# EAGLE board nrings (EAGLE 7.5.0)
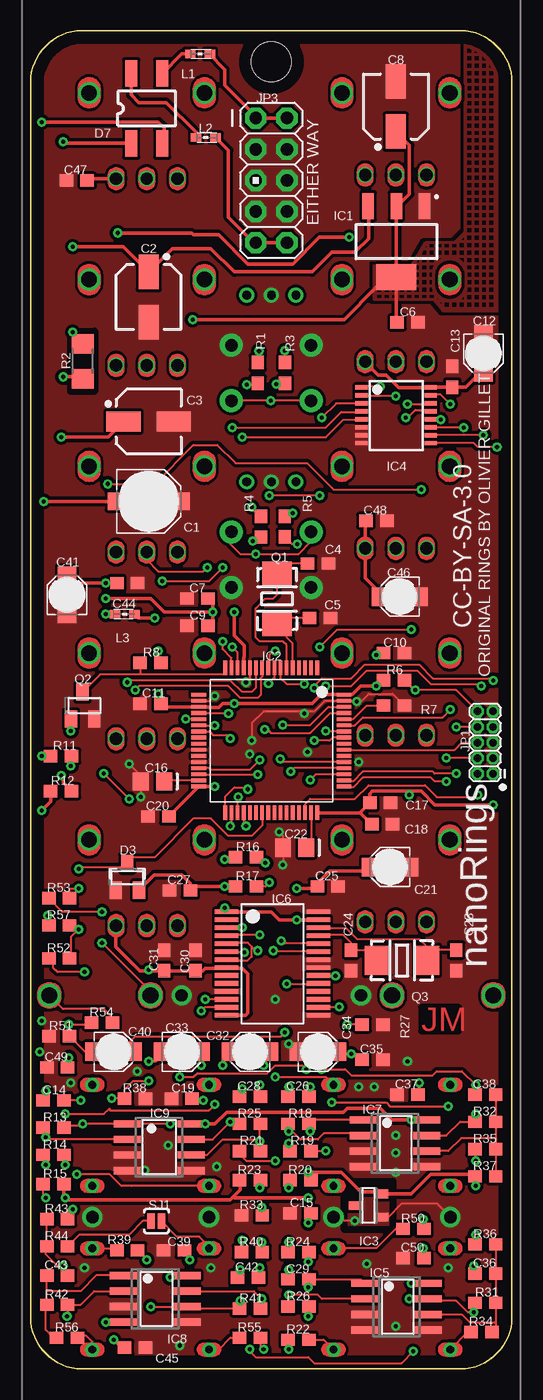
[diagram p0: board, top side]
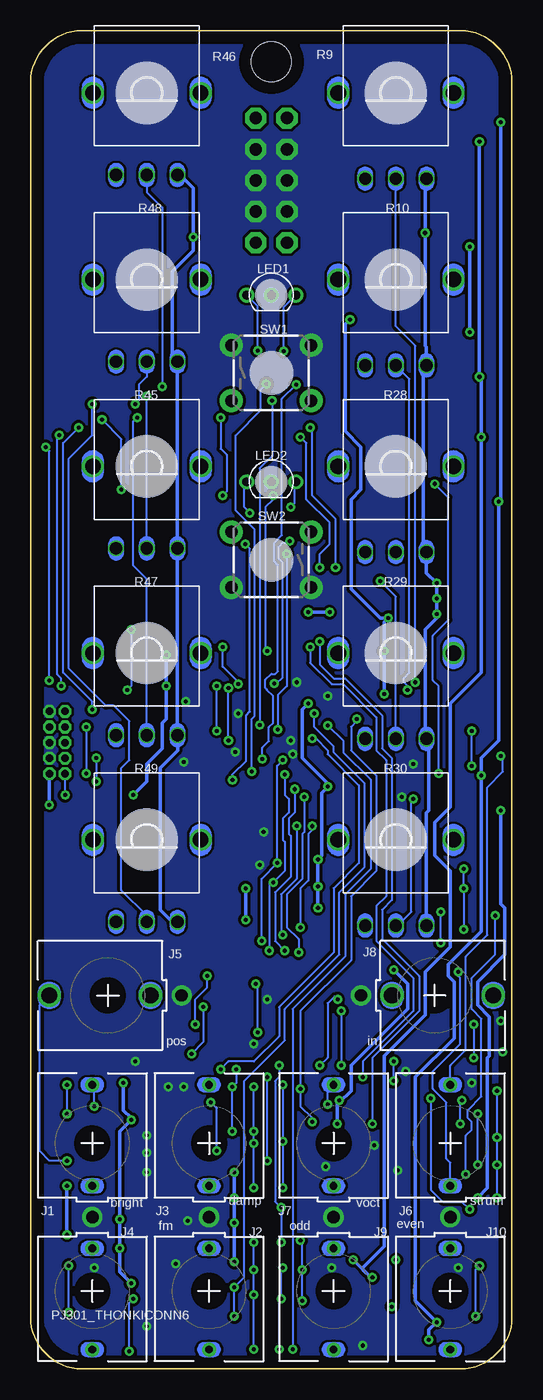
[diagram p1: board, bottom side, seen from below]

Size 39.27 x 109.22 mm. Coordinates in mm from the lower left corner, seen from the top.
Outline: 0,3.81 arc76 3.76,0 35.51,0 arc76 39.27,3.81 39.27,105.41 arc76 35.51,109.22 3.76,109.22 arc76 0,105.41 0,3.81
Copper layers (1*16): Top 0.035mm / dielectric 1.5mm / Bottom 0.035mm
Design rules "default *": minimum track width 10mil, minimum drill 0.61mm, track to track 8mil, track to pad 8mil, pad to pad 8mil, via to via 8mil, smd to smd 8mil, copper to edge 40mil, drill to drill 8mil, minimum pad ring 0mil, minimum via ring 8mil, stop-mask expansion 4mil, vias tented up to drill 13mil, thermal gap 10mil
Net classes: 0 default: width 0.178 mm, clearance 0.152 mm, clearance 0.152 mm to class 1, clearance 0.152 mm to class 2; 1 hipriority: width 0.178 mm, clearance 0.152 mm, clearance 0.152 mm to class 0, clearance 0.152 mm to class 2; 2 powa: width 0.305 mm, clearance 0.152 mm, clearance 0.152 mm to class 0, clearance 0.152 mm to class 1
Holes 3.23 mm at 19.63,106.68

## Footprints (pad centres in the part's own frame; a part is rotated, then mirrored left to right if it is on the bottom)
PANASONIC_C = smd 2.6 x 1.4: + 2.05,0; - -2.05,0
CAPAE-5.3x5.3h7 = smd 2.8 x 1.65: 1 -2.05,0; 2 2.05,0
CAPAE-5.3x5.3h7_C3 = smd 2.8 x 1.65: 1 -2.05,0; 2 2.05,0
CAP_0603 = smd 1.1 x 1: 1 -0.85,0; 2 0.85,0
CAP_0603_C6 = smd 1.1 x 1: 1 -0.85,0; 2 0.85,0
CAP_0603_C7 = smd 1.1 x 1: 1 -0.85,0; 2 0.85,0
CAPAE-5.3x5.3h7_C8 = smd 2.8 x 1.65: 1 -2.05,0; 2 2.05,0
PANASONIC_A = smd 2 x 1.5: + 1.3,0; - -1.3,0
CAP_0603_C13 = smd 1.1 x 1: 1 -0.85,0; 2 0.85,0
CAP_0805 = smd 1.3 x 1.5: 1 -0.95,0; 2 0.95,0
PANASONIC_A_C21 = smd 2 x 1.5: + 1.3,0; - -1.3,0
CAP_0603_C23 = smd 1.1 x 1: 1 -0.85,0; 2 0.85,0
CAP_0603_C24 = smd 1.1 x 1: 1 -0.85,0; 2 0.85,0
PANASONIC_A_C32 = smd 2 x 1.5: + 1.3,0; - -1.3,0
PANASONIC_A_C33 = smd 2 x 1.5: + 1.3,0; - -1.3,0
PANASONIC_A_C34 = smd 2 x 1.5: + 1.3,0; - -1.3,0
CAP_0603_C39 = smd 1.1 x 1: 1 -0.85,0; 2 0.85,0
PANASONIC_A_C40 = smd 2 x 1.5: + 1.3,0; - -1.3,0
PANASONIC_A_C41 = smd 2 x 1.5: + 1.3,0; - -1.3,0
CAP_0603_C44 = smd 1.1 x 1: 1 -0.85,0; 2 0.85,0
CAP_0603_C45 = smd 1.1 x 1: 1 -0.85,0; 2 0.85,0
PANASONIC_A_C46 = smd 2 x 1.5: + 1.3,0; - -1.3,0
SOT23 = smd 1 x 1.4: 1 -0.95,-1.1; 2 0.95,-1.1; 3 0,1.1
SOP-4/6.5x2.54 = smd 2.2 x 1: 1 -2.855,1.27; 2 -2.855,-1.27; 3 2.855,-1.27; 4 2.855,1.27
SOT223-4 = smd 2.15 x 0.95: 1 -2.9,2.3; 2 -2.9,0; 3 -2.9,-2.3 | smd 2.15 x 3.25: 4 2.9,0
TQFP-10X10-64 = smd 1.2 x 0.3: 1 -5.936,3.75; 2 -5.936,3.25; 3 -5.936,2.75; 4 -5.936,2.25; 5 -5.936,1.75; 6 -5.936,1.25; 7 -5.936,0.75; 8 -5.936,0.25; 9 -5.936,-0.25; 10 -5.936,-0.75; 11 -5.936,-1.25; 12 -5.936,-1.75; 13 -5.936,-2.25; 14 -5.936,-2.75; 15 -5.936,-3.25; 16 -5.936,-3.75; 33 5.886,-3.75; 34 5.886,-3.25; 35 5.886,-2.75; 36 5.886,-2.25; 37 5.886,-1.75; 38 5.886,-1.25; 39 5.886,-0.75; 40 5.886,-0.25; 41 5.886,0.25; 42 5.886,0.75; 43 5.886,1.25; 44 5.886,1.75; 45 5.886,2.25; 46 5.886,2.75; 47 5.886,3.25; 48 5.886,3.75 | smd 0.3 x 1.2: 17 -3.75,-5.911; 18 -3.25,-5.911; 19 -2.75,-5.911; 20 -2.25,-5.911; 21 -1.75,-5.911; 22 -1.25,-5.911; 23 -0.75,-5.911; 24 -0.25,-5.911; 25 0.25,-5.911; 26 0.75,-5.911; 27 1.25,-5.911; 28 1.75,-5.911; 29 2.25,-5.911; 30 2.75,-5.911; 31 3.25,-5.911; 32 3.75,-5.911; 49 3.75,5.936; 50 3.25,5.936; 51 2.75,5.936; 52 2.25,5.936; 53 1.75,5.936; 54 1.25,5.936; 55 0.75,5.936; 56 0.25,5.936; 57 -0.25,5.936; 58 -0.75,5.936; 59 -1.25,5.936; 60 -1.75,5.936; 61 -2.25,5.936; 62 -2.75,5.936; 63 -3.25,5.936; 64 -3.75,5.936
DBZ_R-PDSO-G3 = smd 0.7 x 1: 1 -0.95,-1.1; 2 0.95,-1.1; 3 0,1.1
TSSOP16 = smd 0.35 x 1: 1 -1.95,-2.825; 2 -1.3,-2.825; 3 -0.65,-2.825; 4 0,-2.825; 5 0.65,-2.825; 6 1.3,-2.825; 7 1.95,-2.825; 8 2.6,-2.825; 9 2.6,2.825; 10 1.95,2.825; 11 1.3,2.825; 12 0.65,2.825; 13 0,2.825; 14 -0.65,2.825; 15 -1.3,2.825; 16 -1.95,2.825
SO08 = smd 0.6 x 2.2: 1 -1.905,-2.6; 2 -0.635,-2.6; 3 0.635,-2.6; 4 1.905,-2.6; 5 1.905,2.6; 6 0.635,2.6; 7 -0.635,2.6; 8 -1.905,2.6
SSOP28 = smd 0.381 x 1.905: 1 -4.55,-3.752; 2 -3.9,-3.752; 3 -3.25,-3.752; 4 -2.6,-3.752; 5 -1.95,-3.752; 6 -1.3,-3.752; 7 -0.65,-3.752; 8 0,-3.752; 9 0.65,-3.752; 10 1.3,-3.752; 11 1.95,-3.752; 12 2.6,-3.752; 13 3.25,-3.752; 14 3.9,-3.752; 15 3.9,3.752; 16 3.25,3.752; 17 2.6,3.752; 18 1.95,3.752; 19 1.3,3.752; 20 0.65,3.752; 21 0,3.752; 22 -0.65,3.752; 23 -1.3,3.752; 24 -1.95,3.752; 25 -2.6,3.752; 26 -3.25,3.752; 27 -3.9,3.752; 28 -4.55,3.752
SO08_IC7 = smd 0.6 x 2.2: 1 -1.905,-2.6; 2 -0.635,-2.6; 3 0.635,-2.6; 4 1.905,-2.6; 5 1.905,2.6; 6 0.635,2.6; 7 -0.635,2.6; 8 -1.905,2.6
SO08_IC8 = smd 0.6 x 2.2: 1 -1.905,-2.6; 2 -0.635,-2.6; 3 0.635,-2.6; 4 1.905,-2.6; 5 1.905,2.6; 6 0.635,2.6; 7 -0.635,2.6; 8 -1.905,2.6
SO08_IC9 = smd 0.6 x 2.2: 1 -1.905,-2.6; 2 -0.635,-2.6; 3 0.635,-2.6; 4 1.905,-2.6; 5 1.905,2.6; 6 0.635,2.6; 7 -0.635,2.6; 8 -1.905,2.6
Thonkiconn = drill 0.635 pad 1.143: 1 0,3.48; 2 0,-4.775 | drill 1.016 pad 1.651: 3 0,6.02
Thonkiconn_J2 = drill 0.635 pad 1.143: 1 0,3.48; 2 0,-4.775 | drill 1.016 pad 1.651: 3 0,6.02
Thonkiconn_J4 = drill 0.635 pad 1.143: 1 0,3.48; 2 0,-4.775 | drill 1.016 pad 1.651: 3 0,6.02
Thonkiconn_J5 = drill 1.321 pad 1.905: 1 0,3.48; 2 0,-4.775 | drill 1.016 pad 1.651: 3 0,6.02
Thonkiconn_J9 = drill 0.635 pad 1.143: 1 0,3.48; 2 0,-4.775 | drill 1.016 pad 1.651: 3 0,6.02
2X5-1.27 = drill 0.61 pad 1.033 octagon: 1 -1.27,3.81; 2 0,3.81; 3 -1.27,2.54; 4 0,2.54; 5 -1.27,1.27; 6 0,1.27; 7 -1.27,0; 8 0,0; 9 -1.27,-1.27; 10 0,-1.27
AVR_ICSP = drill 1.016 pad 1.737 octagon: 1 -1.27,5.08; 2 1.27,5.08; 3 -1.27,2.54; 4 1.27,2.54; 5 -1.27,0; 6 1.27,0; 7 -1.27,-2.54; 8 1.27,-2.54; 9 -1.27,-5.08; 10 1.27,-5.08
0603 = smd 0.85 x 0.7: 1 -0.9,0; 2 0.7,0
0603_L2 = smd 0.85 x 0.7: 1 -0.9,0; 2 0.7,0
0603_L3 = smd 0.85 x 0.7: 1 -0.9,0; 2 0.7,0
LED-BICOLOR-THROUGHHOLE = drill 0.7 pad 1.208: 1 -2,0; 2 0,0; 3 2,0
TSC_7A_crystal = smd 2 x 2.4: 1 2.036,0; 2 -2.035,0
SOT23-BEC = smd 1 x 1.4: B -0.95,-1.1; C 0,1.1; E 0.95,-1.1
TSC_7A_crystal_Q3 = smd 2 x 2.4: 1 2.036,0; 2 -2.035,0
RES_0603 = smd 1.1 x 1: 1 -0.85,0; 2 0.85,0
R1206 = smd 1.6 x 1.803: 1 -1.422,0; 2 1.422,0
RES_0603_R4 = smd 1.1 x 1: 1 -0.85,0; 2 0.85,0
RES_0603_R5 = smd 1.1 x 1: 1 -0.85,0; 2 0.85,0
RES_0603_R6 = smd 1.1 x 1: 1 -0.85,0; 2 0.85,0
RES_0603_R7 = smd 1.1 x 1: 1 -0.85,0; 2 0.85,0
RES_0603_R8 = smd 1.1 x 1: 1 -0.85,0; 2 0.85,0
ALPS_POT_VERTICAL_PS = drill 1 pad 1.27: P$1 -2.5,7; P$2 0,7; P$3 2.5,7 | drill 1.27 pad 1.778: P$4 -4.7,0; P$5 4.7,0
ALPS_POT_VERTICAL_PS_R10 = drill 1 pad 1.27: P$1 -2.5,7; P$2 0,7; P$3 2.5,7 | drill 1.27 pad 1.778: P$4 -4.7,0; P$5 4.7,0
RES_0603_R27 = smd 1.1 x 1: 1 -0.85,0; 2 0.85,0
RES_0603_R39 = smd 1.1 x 1: 1 -0.85,0; 2 0.85,0
ALPS_POT_VERTICAL = drill 1 pad 1.27: P$1 -2.5,6.7; P$2 0,6.7; P$3 2.5,6.7 | drill 1.27 pad 1.778: P$4 -4.4,0; P$5 4.4,0
ALPS_POT_VERTICAL_R46 = drill 1 pad 1.27: P$1 -2.5,6.7; P$2 0,6.7; P$3 2.5,6.7 | drill 1.27 pad 1.778: P$4 -4.4,0; P$5 4.4,0
SJ_2S-NOTRACE = smd 0.635 x 1.27: 1 -0.45,0; 2 0.4,0
TACTILE-PTH = drill 1.016 pad 1.88: 1 -3.251,2.261; 2 3.251,2.261; 3 -3.251,-2.261; 4 3.251,-2.261
TACTILE-PTH_SW2 = drill 1.016 pad 1.88: 1 -3.251,2.261; 2 3.251,2.261; 3 -3.251,-2.261; 4 3.251,-2.261

## Placement (x,y rotation side)
C1  22u  [PANASONIC_C]  9.63,70.8 0 top
C2  47u  [CAPAE-5.3x5.3h7]  9.63,87.47 270 top
C3  47u  [CAPAE-5.3x5.3h7_C3]  9.63,77.31 0 top
C4  18p  [CAP_0603]  23.44,65.72 180 top
C5  18p  [CAP_0603]  23.6,61.28 180 top
C6  100n  [CAP_0603_C6]  30.75,85.41 0 top
C7  1u  [CAP_0603_C7]  13.6,62.87 180 top
C8  47u  [CAPAE-5.3x5.3h7_C8]  29.79,103.03 90 top
C9  100n  [CAP_0603_C7]  13.6,60.64 180 top
C10  100n  [CAP_0603_C6]  29.64,58.42 0 top
C11  100n  [CAP_0603_C7]  9.79,54.29 180 top
C12  10u  [PANASONIC_A]  36.94,82.87 270 top
C13  100n  [CAP_0603_C13]  34.4,80.96 90 top
C14  2.2n  [CAP_0603_C6]  1.85,21.91 0 top
C15  100n  [CAP_0603_C7]  22.02,12.7 180 top
C16  2.2u  [CAP_0805]  9.95,47.94 180 top
C17  100n  [CAP_0603_C13]  28.52,46.2 0 top
C18  1u  [CAP_0603_C13]  28.68,44.45 0 top
C19  100n  [CAP_0603_C7]  12.33,22.07 180 top
C20  100n  [CAP_0603_C7]  10.43,45.09 180 top
C21  10u  [PANASONIC_A_C21]  29.32,40.96 180 top
C22  2.2u  [CAP_0805]  21.54,42.55 180 top
C23  18p  [CAP_0603_C23]  34.72,33.34 90 top
C24  18p  [CAP_0603_C24]  26.14,33.34 90 top
C25  100n  [CAP_0603_C6]  24.24,39.37 0 top
C26  10n  [CAP_0603_C6]  21.86,22.23 0 top
C27  100n  [CAP_0603_C7]  12.17,39.05 180 top
C28  10n  [CAP_0603_C7]  17.89,22.23 180 top
C29  2.2n  [CAP_0603_C6]  21.86,7.3 0 top
C30  1u  [CAP_0603_C6]  13.44,33.34 90 top
C31  100n  [CAP_0603_C6]  10.9,33.34 90 top
C32  10u  [PANASONIC_A_C32]  17.89,25.88 180 top
C33  10u  [PANASONIC_A_C33]  12.33,25.88 0 top
C34  10u  [PANASONIC_A_C34]  23.44,25.88 0 top
C35  100n  [CAP_0603_C6]  27.89,25.24 0 top
C36  10n  [CAP_0603_C7]  37.1,7.78 180 top
C37  100n  [CAP_0603_C7]  30.75,22.38 180 top
C38  10n  [CAP_0603_C7]  37.1,22.38 180 top
C39  100n  [CAP_0603_C39]  11.7,9.68 180 top
C40  10u  [PANASONIC_A_C40]  6.78,25.88 0 top
C41  10u  [PANASONIC_A_C41]  2.97,63.18 90 top
C42  18p  [CAP_0603_C6]  17.73,7.46 0 top
C43  18p  [CAP_0603_C7]  2.17,7.62 180 top
C44  100n  [CAP_0603_C44]  7.89,64.14 0 top
C45  100n  [CAP_0603_C45]  8.52,1.75 180 top
C46  10u  [PANASONIC_A_C46]  30.11,63.02 180 top
C47  100n  [CAP_0603_C7]  3.76,97 180 top
C48  100n  [CAP_0603_C6]  28.21,69.22 0 top
C49  220p  [CAP_0603_C7]  2.17,24.61 180 top
C50  100n  [CAP_0603_C7]  31.22,9.05 180 top
D3  BAT54S  [SOT23]  7.89,40.16 0 top
D7  MB1S  [SOP-4/6.5x2.54]  9.47,102.87 90 top
IC1  LM1117-3.3  [SOT223-4]  29.84,92 270 top
IC2  STM32F405RGT6  [TQFP-10X10-64]  19.63,51.28 270 top
IC3  LM4040B10  [DBZ_R-PDSO-G3]  27.57,13.34 90 top
IC4  4051PW  [TSSOP16]  29.83,78.15 270 top
IC5  MCP6002  [SO08]  29.85,5.08 270 top
IC6  WM8731  [SSOP28]  19.73,32.76 270 top
IC7  MCP6002  [SO08_IC7]  29.73,18.41 270 top
IC8  TL072  [SO08_IC8]  10.17,5.71 270 top
IC9  MCP6002  [SO08_IC9]  10.49,18.1 270 top
J1  PJ301_THONKICONN6  [Thonkiconn]  34.24,18.41 180 bottom
J2  PJ301_THONKICONN6  [Thonkiconn_J2]  24.71,6.35 0 bottom
J3  PJ301_THONKICONN6  [Thonkiconn]  24.71,18.41 180 bottom
J4  PJ301_THONKICONN6  [Thonkiconn_J4]  34.24,6.35 0 bottom
J5  PJ301_THONKICONN6  [Thonkiconn_J5]  32.97,30.48 270 bottom
J6  PJ301_THONKICONN6  [Thonkiconn]  5.03,18.41 180 bottom
J7  PJ301_THONKICONN6  [Thonkiconn]  14.55,18.41 180 bottom
J8  PJ301_THONKICONN6  [Thonkiconn_J5]  6.3,30.48 90 bottom
J9  PJ301_THONKICONN6  [Thonkiconn_J9]  14.55,6.35 0 bottom
J10  PJ301_THONKICONN6  [Thonkiconn_J2]  5.03,6.35 0 bottom
JP1  M05X2MINIJTAG  [2X5-1.27]  36.46,52.39 180 top
JP3  M05X2PTH  [AVR_ICSP]  19.63,97 0 top
L1  WE-CBF_0603  [0603]  13.92,107.31 0 top
L2  WE-CBF_0603  [0603_L2]  14.4,100.49 0 top
L3  WE-CBF_0603  [0603_L3]  7.57,61.59 180 top
LED1  WP115VEGW  [LED-BICOLOR-THROUGHHOLE]  19.63,87.63 0 bottom
LED2  WP115VEGW  [LED-BICOLOR-THROUGHHOLE]  19.63,72.39 0 bottom
Q1  8MHz  [TSC_7A_crystal]  20.11,62.84 90 top
Q2  MMBT3904  [SOT23-BEC]  4.24,54.13 0 top
Q3  12.288MHz  [TSC_7A_crystal_Q3]  30.3,33.34 0 top
R1  180  [RES_0603]  18.52,81.28 90 top
R2  4.7  [R1206]  4.24,82.23 270 top
R3  180  [RES_0603]  20.75,81.28 90 top
R4  180  [RES_0603_R4]  18.8,68.74 90 top
R5  180  [RES_0603_R5]  20.74,68.75 90 top
R6  10k  [RES_0603_R6]  29.64,56.2 180 top
R7  10k  [RES_0603_R7]  29.64,54.13 180 top
R8  10k  [RES_0603_R8]  9.79,57.63 0 top
R9  10kB  [ALPS_POT_VERTICAL_PS]  9.47,104.14 180 bottom
R10  10kB  [ALPS_POT_VERTICAL_PS_R10]  9.47,88.9 180 bottom
R11  100k  [RES_0603_R8]  2.49,50.01 0 top
R12  2.2k  [RES_0603_R6]  2.49,47.15 180 top
R13  47k  [RES_0603_R6]  1.85,19.68 180 top
R14  100k  [RES_0603_R8]  1.85,17.46 0 top
R15  180k  [RES_0603_R8]  1.85,15.08 0 top
R16  2.2k  [RES_0603_R6]  17.57,41.75 180 top
R17  2.2k  [RES_0603_R6]  17.57,39.37 180 top
R18  20k  [RES_0603_R6]  21.86,20 180 top
R19  100k  [RES_0603_R8]  22.02,17.78 0 top
R20  120k  [RES_0603_R8]  22.02,15.4 0 top
R21  100k  [RES_0603_R6]  17.89,17.78 180 top
R22  100k  [RES_0603_R8]  21.86,2.38 0 top
R23  120k  [RES_0603_R6]  17.89,15.4 180 top
R24  120k  [RES_0603_R8]  21.86,9.53 0 top
R25  20k  [RES_0603_R8]  17.89,20 0 top
R26  20k  [RES_0603_R6]  21.86,5.08 180 top
R27  36k  [RES_0603_R27]  27.89,28.1 0 top
R28  10kB  [ALPS_POT_VERTICAL_PS_R10]  9.47,73.66 180 bottom
R29  10kB  [ALPS_POT_VERTICAL_PS_R10]  9.47,58.42 180 bottom
R30  10kB  [ALPS_POT_VERTICAL_PS_R10]  9.47,43.18 180 bottom
R31  20k  [RES_0603_R8]  37.1,5.4 0 top
R32  20k  [RES_0603_R8]  37.1,20.16 0 top
R33  47k  [RES_0603_R8]  18.05,12.54 0 top
R34  100k  [RES_0603_R6]  36.78,3.02 180 top
R35  100k  [RES_0603_R6]  37.1,17.94 180 top
R36  120k  [RES_0603_R6]  37.1,10.16 180 top
R37  120k  [RES_0603_R6]  37.1,15.72 180 top
R38  47k  [RES_0603_R6]  8.52,22.07 180 top
R39  47k  [RES_0603_R39]  7.89,9.68 180 top
R40  6.8k  [RES_0603_R8]  18.05,9.53 0 top
R41  47k  [RES_0603_R6]  17.89,4.92 180 top
R42  47k  [RES_0603_R8]  2.17,5.24 0 top
R43  6.8k  [RES_0603_R8]  2.17,12.22 0 top
R44  47k  [RES_0603_R8]  2.17,10 0 top
R45  10kB  [ALPS_POT_VERTICAL]  29.79,73.66 180 bottom
R46  10kB  [ALPS_POT_VERTICAL_R46]  29.79,104.14 180 bottom
R47  10kB  [ALPS_POT_VERTICAL]  29.79,58.42 180 bottom
R48  10kB  [ALPS_POT_VERTICAL]  29.79,88.9 180 bottom
R49  10kB  [ALPS_POT_VERTICAL]  29.79,43.18 180 bottom
R50  3.3M  [RES_0603_R8]  31.22,11.43 0 top
R51  6.8k  [RES_0603_R8]  2.33,27.15 0 top
R52  100k  [RES_0603_R6]  2.33,33.5 180 top
R53  1M  [RES_0603_R6]  2.33,38.42 180 top
R54  36k  [RES_0603_R8]  5.82,28.26 0 top
R55  1.0k  [RES_0603_R8]  17.89,2.54 0 top
R56  1.0k  [RES_0603_R6]  2.97,2.54 180 top
R57  470k  [RES_0603_R6]  2.33,36.19 180 top
SJ1  SOLDERJUMPERNC2  [SJ_2S-NOTRACE]  10.27,12.06 0 top
SW1  TAC_SWITCHPTH  [TACTILE-PTH]  19.63,81.28 0 bottom
SW2  TAC_SWITCHPTH  [TACTILE-PTH_SW2]  19.63,66.04 180 bottom

## Library data of the parts
C1-C50 D3 D7 IC1-IC9 J1-J10 JP1 JP3 L1-L3 LED1 LED2 Q1-Q3 R1-R57 SJ1 SW1 SW2 = common

## Nets
+3V3 [powa]: C6.1 C8.1 C10.1 C11.1 C17.1 C18.1 C20.1 C21.+ C25.1 C27.1 D3.2 IC1.2 IC1.4 IC2.19 IC2.32 IC2.48 IC2.64 IC6.1 IC6.27 JP1.1 L3.1 R6.2 R8.2 R16.2 R17.2
+3V3_A [powa]: C7.1 C9.1 C12.+ C13.1 C19.1 C30.1 C31.1 C37.1 C41.+ C44.1 C46.+ C47.1 C48.1 C50.1 IC2.13 IC4.16 IC5.8 IC6.8 IC6.14 IC7.8 IC9.8 L3.2 R9.P$1 R10.P$1 R28.P$1 R29.P$1 R30.P$1 R45.P$1 R46.P$1 R47.P$1 R48.P$1 R49.P$1 R50.2
AREF_-10 [powa]: C15.1 IC3.2 R12.2 R15.2 R20.2 R23.2 R24.2 R36.2 R37.2
AUX_OUT: C33.+ IC6.13
BOOT_FLASH: IC2.60 R7.2
BRIGHTNESS_ATT: IC4.2 R45.P$2
BRIGHTNESS_CV: C26.2 IC2.14 IC7.1 R18.1
BRIGHTNESS_POT: IC4.4 R28.P$2
CV_NORMALIZATION: J7.1 R57.2
DAMP_ATT: IC4.13 R47.P$2
DAMP_CV: C28.2 IC2.21 IC9.7 R25.1
DAMP_POT: IC4.5 R29.P$2
FM_CV: C29.2 IC2.20 IC5.1 R26.1
FREQUENCY_ATT: IC4.1 R46.P$2
FREQUENCY_POT: IC2.11 R9.P$2
GEOMETRY_ATT: IC4.14 R48.P$2
GEOMETRY_CV: C36.2 IC2.22 IC5.7 R31.1
GEOMETRY_POT: IC2.10 R10.P$2
GND: C1.+ C2.2 C3.2 C4.1 C5.1 C6.2 C7.2 C8.2 C9.2 C10.2 C11.2 C12.- C13.2 C15.2 C16.2 C17.2 C18.2 C19.2 C20.2 C21.- C22.2 C23.1 C24.1 C25.2 C27.2 C30.2 C31.2 C34.- C35.2 C37.2 C39.2 C41.- C44.2 C45.1 C46.- C47.2 C48.2 C49.2 C50.2 D3.1 IC1.1 IC2.12 IC2.18 IC2.26 IC2.28 IC2.63 IC3.1 IC4.6 IC4.7 IC4.8 IC5.3 IC5.4 IC5.5 IC6.11 IC6.15 IC6.21 IC6.22 IC6.28 IC7.3 IC7.4 IC7.5 IC8.3 IC8.5 IC9.3 IC9.4 IC9.5 J1.3 J2.3 J3.3 J4.3 J5.3 J6.3 J7.3 J8.3 J9.3 J10.3 JP1.3 JP1.5 JP1.9 JP3.3 JP3.4 JP3.5 JP3.6 JP3.7 JP3.8 LED1.2 LED2.2 Q2.E R7.1 R9.P$3 R9.P$4 R9.P$5 R10.P$3 R10.P$4 R10.P$5 R27.2 R28.P$3 R28.P$4 R28.P$5 R29.P$3 R29.P$4 R29.P$5 R30.P$3 R30.P$4 R30.P$5 R33.1 R38.1 R45.P$3 R45.P$4 R45.P$5 R46.P$3 R46.P$4 R46.P$5 R47.P$3 R47.P$4 R47.P$5 R48.P$3 R48.P$4 R48.P$5 R49.P$3 R49.P$4 R49.P$5 R51.1 SW1.1 SW1.2 SW2.1 SW2.2
I2C_SCL: IC2.29 IC6.24 R16.1
I2C_SDA: IC2.30 IC6.23 R17.1
I2S_LRCK: IC2.33 IC6.5 IC6.7
I2S_SCK: IC2.34 IC6.3
I2S_SIN: IC2.35 IC6.6
I2S_SOUT: IC2.36 IC6.4
IN_1: IC6.20 R27.1
IN_2: C40.+ IC6.19
JTCK: IC2.49 JP1.4
JTDI: IC2.50 JP1.8
JTDO: IC2.55 JP1.6
JTMS: IC2.46 JP1.2
MAIN_OUT: C32.+ IC6.12
MUX_ADDR_0: IC2.59 IC4.11
MUX_ADDR_1: IC2.58 IC4.10
MUX_ADDR_2: IC2.57 IC4.9
MUXED_POTS: IC2.9 IC4.3
N$1: J1.2 R19.2
N$2: C26.1 IC7.2 R18.2 R19.1 R20.1
N$3: J7.2 R14.2
N$4: J2.2 R22.2
N$5: C29.1 IC5.2 R22.1 R24.1 R26.2
N$6: J4.2 R34.2
N$7: C5.2 IC2.5 Q1.2
N$8: C4.2 IC2.6 Q1.1
N$9: J6.2 R11.1
N$10: J3.2 R21.2
N$11: C28.1 IC9.6 R21.1 R23.1 R25.2
N$12: LED1.3 R1.2
N$13: C22.1 IC2.47
N$14: C14.1 IC9.2 R13.2 R14.1 R15.1
N$15: C36.1 IC5.6 R31.2 R34.1 R36.1
N$16: C2.1 IC1.3 R2.1
N$17: C34.+ C35.1 IC6.16
N$18: C40.- C49.1 R51.2 R54.1
N$19: C16.1 IC2.31
N$20: J6.1 R52.2
N$21: J8.2 R54.2
N$22: LED1.1 R3.2
N$23: C33.- R38.2 R43.2
N$25: C43.1 IC8.2 R42.2 R43.1 R44.1
N$26: J5.2 R35.2
N$27: LED2.3 R4.2
N$28: C43.2 IC8.1 R42.1 R56.2
N$29: J10.2 R56.1
N$30: C38.1 IC7.6 R32.2 R35.1 R37.1
N$31: C32.- R33.2 R40.2
N$32: C42.1 IC8.6 R39.1 R40.1 R41.2
N$33: C42.2 IC8.7 R41.1 R55.2
N$34: J9.2 R55.1
N$35: LED2.1 R5.2
N$37: IC2.52 R3.1
N$38: J2.1 R50.1
N$39: J8.1 R53.2
N$40: IC2.8 R4.1
N$41: C24.2 IC6.25 Q3.2
N$42: C23.2 IC6.26 Q3.1
N$43: IC2.53 R1.1
N$44: IC2.51 R5.1
N$45: J10.1 R39.2
N$46: R44.2 SJ1.1
N$47: J9.1 SJ1.2
N$56: JP3.1 JP3.2 L1.2
N$64: JP3.9 JP3.10 L2.2
N$66: Q2.B R11.2
Net_95: D7.3 L1.1
Net_96: D7.4 L2.1
NORMALIZATION_PROBE: D3.3 IC2.39 R52.1 R53.1 R57.1
POSITION_ATT: IC4.15 R49.P$2
POSITION_CV: C38.2 IC2.23 IC7.7 R32.1
POSITION_POT: IC4.12 R30.P$2
RESET: IC2.7 JP1.10 R6.1
STRUM: IC2.16 Q2.C R8.1
SW_MODE: IC2.61 SW2.3 SW2.4
SW_POLYPHONY: IC2.62 SW1.3 SW1.4
V_OCT_CV: C14.2 IC2.15 IC9.1 R13.1
VCC [powa]: C3.1 C39.1 D7.1 IC8.8 R2.2
VEE [powa]: C1.- C45.2 D7.2 IC8.4 R12.1

## Tracks (layer width: path | path; a pad name or v marks a point on that pad's centre or on a via)
+3V3  (via drill 0.33 pad 0.7)
  Top 0.3: 12.97,54.03 IC2.19 14.48,54.03 | 26.24,55.03 IC2.64 24.82,55.03 | IC2.48 23.69,45.39 | 13.19,46.99 IC2.32 14.48,47.53
  Top 0.305: IC6.27 v21.73,36.66 20.28,36.66 19.63,37.31 IC6.1 15.98,37.62 v15.82,37.62 | R17.2 v15.82,39.37 13.34,39.37 C27.1 13.02,39.63 12.33,40.32 10.1,40.32 D3.2 | v15.82,41.59 16.56,41.59 R16.2 | v21.73,39.21 23.23,39.21 C25.1 23.39,39.63 24.4,40.64 27.7,40.64 C21.+ | 12.97,54.03 10.91,54.03 C11.1 10.64,55.3 v10.43,55.09 | v10.43,58.58 10.43,57.84 R8.2 | R6.2 28.79,56.3 v28.21,55.72 26.94,55.72 26.24,55.03 | v28.21,58.26 28.21,58.1 28.47,58.1 C10.1 | 23.69,45.39 26.89,45.39 26.95,45.34 | 26.95,45.34 C18.1 | 26.95,45.34 26.95,45.47 C17.1 27.67,46.93 27.89,47.15 30.91,47.15 | 30.91,47.15 31.86,47.15 32.97,46.04 v37.73,46.04 | v10.11,61.28 8.79,61.28 L3.1 | 13.19,46.99 C20.1 | 14.48,47.53 v15.03,47.53 | 14.48,54.03 14.53,53.98 15.35,53.98 15.67,54.29 v16.62,54.29 22.97,54.29 23.7,55.03 24.82,55.03 | v30.91,46.83 30.91,47.15 | C8.1 30.91,99.87 30.91,95.89 29.92,94.9 IC1.2 IC1.4 29.84,88.27 | 29.84,88.27 29.84,85.47 C6.1 | v13.21,85.64 25.58,85.64 28.21,88.27 29.84,88.27
  Bottom 0.305: v15.82,37.62 v15.82,39.37 v15.82,41.59 15.51,41.91 15.51,46.99 15.03,47.47 v15.03,47.53 15.03,47.78 17.09,49.85 17.09,53.82 v16.62,54.29 | v21.73,36.66 v21.73,39.21 | v10.43,55.09 v10.43,58.58 10.43,60.96 v10.11,61.28 10.74,61.28 13.12,63.66 13.12,70.96 12.33,71.75 12.33,75.25 13.6,76.52 13.6,85.25 v13.21,85.64 | v28.21,58.26 v28.21,55.72 28.21,53.02 28.52,52.7 28.52,50.64 29.79,49.37 29.79,47.94 v30.91,46.83 | v37.73,46.04 JP1.1
  pour Top (isolate 0.305, hatched): 31.19,90.14 32.25,91.95 34.61,91.95 35.48,92.82 35.48,108.72 36.56,108.31 37.49,107.69 37.95,107.23 38.42,106.61 38.72,106.02 38.72,104.62 38.72,86.33 33.66,86.33 32.87,87.28 28.02,87.28 28.02,90.04 30.94,90.04
+3V3_A  (via drill 0.33 pad 0.7)
  Top 0.3: IC2.13 17.38,58.08
  Top 0.305: IC5.8 v31.06,6.99 | v32.02,9.84 32.02,9.11 C50.1 | v32.02,12.22 32.02,11.49 R50.2 | IC7.8 v31.06,20.32 29.48,20.32 28.52,21.27 25.82,21.27 25.51,20.95 15.98,20.95 15.03,20 v14.24,20 IC9.8 | v31.7,23.34 31.7,22.49 C37.1 | C44.1 v6.14,64.14 3.31,64.14 C41.+ | v6.14,61.59 L3.2 | 17.38,58.08 17.41,58.1 17.41,59.05 16.62,59.85 v16.62,61.75 | v14.87,61.75 14.87,62.45 C7.1 | v14.87,61.75 14.87,61.06 C9.1 | 9.63,32.49 C31.1 C30.1 14.02,32.49 14.24,32.7 15.93,32.7 IC6.8 16.04,32.7 17.25,32.7 17.73,32.23 17.73,29.05 17.53,28.86 IC6.14 | 9.63,32.49 8.89,32.49 6.93,34.45 6.93,36.14 R30.P$1 | v14.08,21.91 13.34,21.91 C19.1 | C12.+ 35.48,80.11 C13.1 32.66,80.11 IC4.16 30.02,80.1 29,81.12 28.37,81.12 R48.P$1 | v14.87,61.75 10.9,61.75 9.79,62.87 v6.14,62.87 | v25.98,92.35 23.56,92.35 21.38,90.17 17.73,90.17 15.35,92.55 13.28,92.55 13.12,92.71 v7.09,92.71 | R9.P$1 4.75,97.14 C47.1 | v9.63,32.54 9.63,32.49 | C46.+ 27.29,64.54 R45.P$1 27.29,69.15 C48.1
  Bottom 0.305: v31.06,6.99 32.02,7.94 v32.02,9.84 v32.02,12.22 32.02,19.37 v31.06,20.32 31.06,20.48 31.7,21.11 v31.7,23.34 | R9.P$1 7.09,97.14 v7.09,92.71 7.09,83.5 6.97,83.38 R10.P$1 7.25,81.9 7.25,66.66 R28.P$1 6.97,64.97 v6.14,64.14 v6.14,62.87 v6.14,61.59 6.14,61.28 7.09,60.33 7.09,51.54 R29.P$1 6.78,51.42 6.78,45.56 6.97,45.36 R30.P$1 | v16.62,61.75 v14.87,61.75 | R46.P$1 27.06,97.44 25.98,96.36 v25.98,92.35 25.98,91.28 27.73,89.53 27.73,82.2 R48.P$1 R45.P$1 R47.P$1 27.25,51.72 27.25,50.48 28.68,49.05 28.68,37.47 27.7,36.48 R49.P$1 | v14.24,20 14.24,21.75 v14.08,21.91 14.08,21.75 13.12,22.7 13.12,24.77 8.52,29.37 8.52,31.43 v9.63,32.54
AREF_-10  (via drill 0.33 pad 0.7)
  Top 0.305: R15.2 2.7,14.07 v2.81,13.97 2.81,13.94 2.93,13.81 16.3,13.81 16.62,14.13 | 16.62,14.13 16.62,13.97 | 16.62,13.97 16.62,14.13 | 16.62,14.13 17.09,14.61 17.09,15.46 R23.2 | 16.62,13.97 v22.65,13.97 | R20.2 22.65,15.61 v22.65,16.03 25.35,16.03 26.94,14.45 28.51,14.45 IC3.2 31.06,14.29 32.65,15.88 36.09,15.88 R37.2 36.25,14.98 v36.3,14.92 | v22.65,11.91 22.65,12.48 C15.1 | v22.65,8.73 22.65,9.47 R24.2 | v36.3,10.95 36.3,10.22 R36.2 | R12.2 1.64,46.3 v0.9,45.56
  Bottom 0.305: v22.65,16.03 v22.65,13.97 v22.65,11.91 v22.65,8.73 | v36.3,14.92 v36.3,10.95 | v0.9,45.56 0.9,37.94 0.58,37.62 0.58,33.81 2.81,31.59 2.81,29.69 1.85,28.73 1.85,25.56 2.01,25.4 2.01,14.76 v2.81,13.97
AUX_OUT  (via drill 0.33 pad 0.7)
  Top 0.178: IC6.13 14.21,29.51 v13.92,29.21 | v13.92,24.77 14.08,24.77 14.08,25.43 C33.+
  Bottom 0.178: v13.92,29.21 v13.92,24.77
BOOT_FLASH
  Top 0.178: IC2.60 26.3,53.03 27.41,54.13 R7.2
BRIGHTNESS_ATT  (via drill 0.33 pad 0.7)
  Top 0.178: v29.79,79.38 27.08,79.38 IC4.2
  Bottom 0.178: R45.P$2 v29.79,79.38
BRIGHTNESS_CV  (via drill 0.33 pad 0.7)
  Top 0.178: IC7.1 23.02,20.32 R18.1 22.71,19.47 v22.81,19.37 | v22.81,23.02 22.65,23.02 22.65,22.28 C26.2 | IC2.14 16.88,58.47 v16.46,58.9 | v12.17,23.81 13.28,23.81 13.6,24.13 19.32,24.13 19.95,24.77 22.17,24.77 v22.49,24.45
  Bottom 0.178: v22.81,19.37 v22.81,23.02 22.49,23.34 v22.49,24.45 | v16.46,58.9 16.46,57.63 14.71,55.88 13.76,55.88 11.06,53.18 11.06,50.48 10.27,49.69 10.27,38.58 11.06,37.78 11.06,34.92 8.04,31.91 8.04,29.21 12.17,25.08 v12.17,23.81
BRIGHTNESS_POT  (via drill 0.33 pad 0.7)
  Top 0.178: R28.P$2 9.47,66.04 10.43,65.09 14.08,65.09 v14.39,65.41 | v16.46,76.83 24.08,76.83 25.35,78.11 26.96,78.11 IC4.4
  Bottom 0.178: v14.39,65.41 14.39,69.37 16.3,71.28 16.3,76.68 v16.46,76.83
CV_NORMALIZATION  (via drill 0.33 pad 0.7)
  Top 0.178: J7.1 8.22,14.94 8.2,14.92 7.41,14.92 6.46,15.88 v3.76,15.88 | v1.38,36.99 1.48,36.99 R57.2
  Bottom 0.178: v3.76,15.88 3.76,19.05 3.28,19.53 3.28,20.16 3.6,20.48 3.6,21.11 2.49,22.23 2.49,28.57 3.28,29.37 3.28,31.91 1.38,33.81 v1.38,36.99
DAMP_ATT  (via drill 0.33 pad 0.7)
  Top 0.178: v30.59,77.63 30.75,77.63 31.38,78.26 32.54,78.26 IC4.13
  Bottom 0.178: R47.P$2 29.79,64.45 30.91,65.56 30.91,77.31 v30.59,77.63
DAMP_CV  (via drill 0.33 pad 0.7)
  Top 0.178: C28.2 17.25,22.23 v17.25,22.86 | v16.3,20.16 17.09,20.16 17.09,20.06 R25.1 17.2,20.16 v16.3,20.16 | IC9.7 14.87,18.73 v16.3,20.16 | IC2.21 v12.65,53.03
  Bottom 0.178: v16.3,20.16 16.3,20.48 17.25,21.43 v17.25,22.86 17.25,29.21 13.12,33.34 13.12,38.58 11.06,40.64 11.06,48.42 13.12,50.48 13.12,52.39 12.65,52.86 v12.65,53.03
DAMP_POT  (via drill 0.33 pad 0.7)
  Top 0.178: v10.74,64.29 14.55,64.29 v15.67,65.41 | v17.25,76.04 24.08,76.04 25.51,77.47 26.97,77.47 IC4.5
  Bottom 0.178: R29.P$2 9.47,63.02 v10.74,64.29 | v15.67,65.41 15.67,66.52 14.87,67.31 14.87,69.06 16.78,70.96 16.78,75.56 v17.25,76.04
FM_CV  (via drill 0.33 pad 0.7)
  Top 0.178: R26.1 22.71,4.34 v22.65,4.29 | v22.65,6.67 22.65,7.25 C29.2 26.94,7.3 IC5.1 | v16.14,53.5 13.75,53.5 IC2.20
  Bottom 0.178: v22.65,4.29 v22.65,6.67 21.86,7.46 21.86,23.5 18.52,26.83 18.52,29.37 14.08,33.81 14.08,38.89 12.01,40.96 12.01,47.78 14.55,50.32 14.55,50.8 16.14,52.39 v16.14,53.5
FREQUENCY_ATT  (via drill 0.33 pad 0.7)
  Top 0.178: v28.52,80.17 27.07,80.17 IC4.1
  Bottom 0.178: R46.P$2 29.79,96.04 28.52,94.77 v28.52,80.17
FREQUENCY_POT  (via drill 0.33 pad 0.7)
  Top 0.178: IC2.11 18.38,55.58 18.05,55.24 17.25,55.24 16.3,56.2 8.04,56.2 v7.89,56.04
  Bottom 0.178: v7.89,56.04 7.89,83.5 9.47,85.09 R9.P$2
GEOMETRY_ATT  (via drill 0.33 pad 0.7)
  Top 0.178: v30.75,78.74 32.59,78.74 IC4.14
  Bottom 0.178: R48.P$2 29.79,80.96 30.43,80.33 30.43,79.06 v30.75,78.74
GEOMETRY_CV  (via drill 0.33 pad 0.7)
  Top 0.178: R31.1 36.25,4.71 v36.14,4.6 35.67,4.6 34.72,5.56 32.61,5.56 IC5.7 v30.91,5.71 | v36.14,8.41 36.14,7.88 C36.2 | IC2.22 v15.01,52.53 | v17.89,1.59 17.73,1.59 18.36,0.95 22.65,0.95 23.13,0.48 30.27,0.48 v31.22,1.43
  Bottom 0.178: v36.14,4.6 v36.14,8.41 | v15.01,52.53 13.76,51.28 13.76,50.32 11.54,48.1 11.54,40.8 13.6,38.73 13.6,33.66 17.89,29.37 v17.89,1.59 | v31.22,1.43 31.22,5.4 v30.91,5.71
GEOMETRY_POT  (via drill 0.33 pad 0.7)
  Top 0.178: IC2.10 18.88,56.51 18.75,56.38 18.75,55 18.52,54.77 17.09,54.77 16.14,55.72 8.84,55.72 v8.52,55.4
  Bottom 0.178: v8.52,55.4 8.52,55.72 8.84,56.04 8.84,56.36 8.36,56.83 8.36,80.79 R10.P$2
GND  (via drill 0.33 pad 0.7)
  Top 0.178: v26.46,12.06 25.02,12.06 J2.3 | IC3.1 29.16,12.38 30.27,13.49 33.14,13.49 J1.3 | v8.04,49.37 9,48.42 C16.2 v9,46.67 | v20.59,41.12 C22.2 20.59,43.49 v20.27,43.81 | IC2.18 14.63,54.53 v15.03,54.93 | IC2.12 17.88,56.35 v17.57,56.04 | 26.62,54.53 IC2.63 24,54.53 23.13,53.66 22.33,53.66 | 26.62,54.53 27.01,54.53 27.57,55.09 29.53,55.09 R7.1 | v26.62,54.45 26.62,54.53 | 22.33,53.66 19,53.66 18.05,52.7 v18.05,51.28 | v21.06,26.51 21.51,26.51 C34.- | v22.33,53.5 22.33,53.66
  other vias: 11.22,18.26 15.19,16.51 9.32,16.19 29.79,16.03 29.79,17.62 29.79,19.05 17.89,50.16 22.59,50.35 27.41,8.57 34.08,8.26 12.17,1.91 4.39,8.26 29.79,3.49 14.71,8.26 8.68,24.29 3.28,23.34 0.9,28.42 0.74,25.88 28.05,23.02 26.78,23.02 30.75,25.08 19.95,30.16 26.78,49.53
  pour Bottom (isolate 0.229, rank 2): 0.52,3.87 0.67,3.17 0.96,2.5 1.36,1.9 1.87,1.38 2.46,0.97 3.12,0.68 3.82,0.52 35.45,0.52 36.14,0.68 36.81,0.97 37.4,1.38 37.91,1.9 38.31,2.5 38.6,3.17 38.75,3.87 38.75,105.35 38.6,106.05 38.31,106.72 37.91,107.32 37.4,107.84 36.81,108.25 36.14,108.54 35.45,108.7 3.82,108.7 3.12,108.54 2.46,108.25 1.87,107.84 1.36,107.32 0.96,106.72 0.67,106.05 0.52,105.35
  pour Top (isolate 0.254, rank 2): 0.53,3.87 0.68,3.17 0.97,2.51 1.37,1.91 1.87,1.39 2.47,0.98 3.13,0.69 3.82,0.53 35.45,0.53 36.14,0.69 36.8,0.98 37.39,1.39 37.9,1.91 38.3,2.51 38.58,3.17 38.73,3.87 38.73,105.35 38.58,106.05 38.3,106.71 37.9,107.31 37.39,107.83 36.8,108.24 36.14,108.53 35.45,108.69 3.82,108.69 3.13,108.53 2.47,108.24 1.87,107.83 1.37,107.31 0.97,106.71 0.68,106.05 0.53,105.35
I2C_SCL  (via drill 0.33 pad 0.7)
  Top 0.178: IC6.24 20.65,34.71 v20.43,34.92 | v19.16,41.27 18.9,41.27 R16.1 | v18.68,49.69 17.89,48.9 14.71,48.9 14.55,49.05 13.75,49.05 IC2.29
  Bottom 0.178: v20.43,34.92 20.43,40.01 v19.16,41.27 19.16,49.21 v18.68,49.69
I2C_SDA  (via drill 0.33 pad 0.7)
  Top 0.178: IC2.30 v18.52,48.53 | v19.48,39.69 19.16,39.37 R17.1 | v19.79,34.13 23.41,34.13 IC6.23
  Bottom 0.178: v18.52,48.53 18.52,46.83 18.21,46.51 18.21,45.4 18.68,44.93 18.68,43.18 18.52,43.02 18.52,40.64 v19.48,39.69 19.79,39.69 v19.79,34.13
I2S_LRCK  (via drill 0.33 pad 0.7)
  Top 0.178: IC6.7 15.98,33.34 17.73,33.34 18.05,33.66 18.05,34.45 | 18.05,34.45 17.73,34.77 16.04,34.77 IC6.5 | IC2.33 15.88,46.73 16.62,47.47 17.57,47.47 v17.73,47.31 | v18.52,34.13 18.36,34.13 18.05,34.45
  Bottom 0.178: v17.73,47.31 17.73,45.4 18.21,44.93 18.21,43.66 18.05,43.5 18.05,40.16 19.32,38.89 19.32,34.92 v18.52,34.13
I2S_SCK  (via drill 0.33 pad 0.7)
  Top 0.178: IC2.34 16.38,44.38 v16.3,44.29 | v17.25,36.04 16.01,36.04 IC6.3
  Bottom 0.178: v16.3,44.29 16.3,43.97 16.62,43.66 16.62,39.85 17.25,39.21 v17.25,36.04
I2S_SIN  (via drill 0.33 pad 0.7)
  Top 0.178: IC2.35 16.88,46.3 16.94,46.35 v16.94,46.67 | v17.41,33.97 15.9,33.97 IC6.6
  Bottom 0.178: v16.94,46.67 16.94,43.81 17.09,43.66 17.09,40.01 18.36,38.73 18.36,36.04 17.41,35.08 v17.41,33.97
I2S_SOUT  (via drill 0.33 pad 0.7)
  Top 0.178: IC2.36 17.38,44.48 v17.57,44.29 | v18.68,35.4 16.03,35.4 IC6.4
  Bottom 0.178: v17.57,44.29 17.57,40.01 18.84,38.73 18.84,35.56 v18.68,35.4
IN_1  (via drill 0.33 pad 0.7)
  Top 0.178: R27.1 v25.82,28.1 | v24.87,32.07 23.45,32.07 IC6.20
  Bottom 0.178: v25.82,28.1 25.82,30.16 24.87,31.11 v24.87,32.07
IN_2  (via drill 0.33 pad 0.7)
  Top 0.178: C40.+ 8.08,26.7 8.52,27.15 20.43,27.15 v20.75,27.46 | v20.9,31.43 23.51,31.43 IC6.19
  Bottom 0.178: v20.75,27.46 20.75,31.27 v20.9,31.43
JTCK  (via drill 0.33 pad 0.7)
  Top 0.178: JP1.4 v33.92,49.85 | v33.92,47.94 32.97,47.94 32.65,48.26 27.09,48.26 26.3,47.47 25.63,47.47 IC2.49
  Bottom 0.178: v33.92,49.85 v33.92,47.94
JTDI  (via drill 0.33 pad 0.7)
  Top 0.178: JP1.8 v34.72,52.39 | v34.72,48.58 32.97,48.58 32.81,48.74 27.09,48.74 26.3,47.94 25.65,47.94 IC2.50
  Bottom 0.178: v34.72,52.39 v34.72,48.58
JTDO
  Top 0.178: IC2.55 34.6,50.53 35.19,51.12 JP1.6
JTMS  (via drill 0.33 pad 0.7)
  Top 0.178: IC2.46 22.38,46.09 22.81,46.51 26.46,46.51 27.57,47.62 32.17,47.62 33.13,46.67 36.3,46.67 v36.46,46.83
  Bottom 0.178: v36.46,46.83 JP1.2
MAIN_OUT  (via drill 0.33 pad 0.7)
  Top 0.178: IC6.12 v14.23,30.16 | v15.67,24.77 15.67,24.95 C32.+
  Bottom 0.178: v14.23,30.16 14.48,30.4 15.03,29.84 15.03,25.4 v15.67,24.77
MUX_ADDR_0  (via drill 0.33 pad 0.7)
  Top 0.178: IC2.59 26.44,52.53 27.09,53.18 33.6,53.18 v34.24,53.82 | v35.35,76.83 32.67,76.83 IC4.11
  Bottom 0.178: v34.24,53.82 34.24,54.45 36.62,56.83 36.62,75.56 v35.35,76.83
MUX_ADDR_1  (via drill 0.33 pad 0.7)
  Top 0.178: IC2.58 24.12,52.03 v24.08,52.07 | v24.08,55.72 26.14,55.72 27.41,56.99 31.54,56.99 32.65,55.88 36.62,55.88 v36.78,55.72 | v36.94,76.2 IC4.10 | IC4.10
  Bottom 0.178: v24.08,52.07 v24.08,55.72 | v36.78,55.72 36.78,56.36 37.1,56.67 37.1,76.36 v36.94,76.2
MUX_ADDR_2  (via drill 0.33 pad 0.7)
  Top 0.178: IC2.57 24.65,51.53 24.4,51.28 v23.13,51.28 | v23.13,55.56 23.13,55.72 23.76,56.36 26.14,56.36 27.25,57.47 31.7,57.47 32.81,56.36 37.57,56.36 v37.73,56.2 | v38.05,75.25 36.46,75.25 36.14,75.56 32.67,75.56 IC4.9
  Bottom 0.178: v23.13,51.28 v23.13,55.56 | v37.73,56.2 37.73,74.93 v38.05,75.25
MUXED_POTS  (via drill 0.33 pad 0.7)
  Top 0.178: IC4.3 24.93,78.8 v23.76,77.63 | v23.6,71.28 v19.48,71.28 | v19.95,58.58 19.79,58.58 19.48,58.26 19.48,57.3 IC2.9
  Bottom 0.178: v23.76,77.63 23.76,75.09 23.29,74.61 23.29,71.6 v23.6,71.28 | v19.48,71.28 19.48,70.96 20.11,70.33 20.11,58.74 v19.95,58.58
N$1  (via drill 0.33 pad 0.7)
  Top 0.178: R19.2 v24.08,17.78 | v24.55,21.75 29,21.75 29.32,21.43 v34.08,21.43
  Bottom 0.178: v24.08,17.78 24.08,21.27 v24.55,21.75 | v34.08,21.43 34.08,23.03 J1.2
N$2  (via drill 0.33 pad 0.7)
  Top 0.178: R20.1 21.16,14.87 v21.06,14.76 | v21.06,18.41 21.06,17.68 R19.1 | v21.06,19.37 21.06,20.06 R18.2 21.06,19.95 21.06,19.68 22.02,18.73 23.44,18.73 23.92,19.21 27.13,19.21 IC7.2 | v21.06,23.02 21.06,22.28 C26.1
  Bottom 0.178: v21.06,14.76 v21.06,18.41 v21.06,19.37 v21.06,23.02
N$3  (via drill 0.33 pad 0.7)
  Top 0.178: R14.2 2.7,16.77 v2.81,16.67 | v2.81,20.8 5.98,20.8 6.44,21.25 6.44,21.11 14.55,21.11 v15.03,21.59
  Bottom 0.178: v2.81,16.67 v2.81,20.8 | v15.03,21.59 15.03,23.19 J7.2
N$4
  Top 0.178: R22.2 23.91,2.38 J2.2
N$5  (via drill 0.33 pad 0.7)
  Top 0.178: IC5.2 23.76,5.71 23.44,6.03 v21.06,6.03 21.06,5.14 R26.2 | v21.06,8.1 21.06,7.36 C29.1 | v21.06,10.32 21.06,9.58 R24.1 | R22.1 21.01,1.64 v21.06,1.59
  Bottom 0.178: v21.06,10.32 v21.06,8.1 v21.06,6.03 v21.06,1.59
N$6
  Top 0.178: R34.2 35.68,3.02 J4.2
N$7
  Top 0.178: IC2.5 21.38,59.21 20.9,59.69 20.9,60.01 Q1.2 20.59,61.28 C5.2
N$8
  Top 0.178: IC2.6 20.88,59.08 20.59,59.37 18.68,59.37 18.36,59.69 18.36,62.07 19.16,62.87 19.79,62.87 20.11,63.18 Q1.1 20.96,65.72 C4.2
N$9  (via drill 0.33 pad 0.7)
  Top 0.178: v0.9,50.01 R11.1
  Bottom 0.178: J6.2 5.03,24.77 3.76,26.04 3.76,33.66 2.01,35.4 2.01,47.47 0.74,48.74 0.74,49.85 v0.9,50.01
N$10  (via drill 0.33 pad 0.7)
  Top 0.178: R21.2 17.04,17.52 17.57,16.99 v19.95,16.99 | v19.95,23.81 24.09,23.81 J3.2
  Bottom 0.178: v19.95,16.99 v19.95,23.81
N$11  (via drill 0.33 pad 0.7)
  Top 0.178: C28.1 18.74,23.12 v18.68,23.18 | v18.68,18.57 18.68,20.06 R25.2 | v18.68,18.57 18.68,17.84 | 18.68,17.84 R21.1 | v18.68,14.76 18.68,15.34 R23.1 | IC9.6 14.39,17.46 15.67,18.73 18.52,18.73 v18.68,18.57 | v18.68,18.57 18.68,17.84
  Bottom 0.178: v18.68,23.18 v18.68,18.57 v18.68,14.76
N$12  (via drill 0.33 pad 0.7)
  Top 0.178: R1.2 18.52,83.18 v18.63,83.07
  Bottom 0.178: v18.63,83.07 18.63,86.63 LED1.3
N$13
  Top 0.178: IC2.47 22.88,42.94 C22.1
N$14  (via drill 0.33 pad 0.7)
  Top 0.178: R15.1 1,14.19 v1.22,13.97 | v1.22,16.67 1.22,17.25 R14.1 | R13.2 1.22,19.47 v1.22,18.89 1.38,18.73 IC9.2 | v1.22,22.7 1.22,22.12 C14.1
  Bottom 0.178: v1.22,13.97 v1.22,16.67 v1.22,18.89 v1.22,22.7
N$15
  Top 0.178: R36.1 C36.1 R31.2 37.95,3.86 | 37.95,3.86 37.95,3.33 R34.1 | IC5.6 35.19,4.45 35.83,3.81 37.9,3.81 37.95,3.86
N$16  (via drill 0.33 pad 0.7)
  Top 0.305: R2.1 4.24,83.82 v3.44,84.61 | v3.44,91.6 7.55,91.6 C2.1 11.55,91.44 14.71,91.44 16.62,89.53 22.97,89.53 24.55,91.12 26.46,91.12 27.57,92.23 27.57,93.98 27.54,94.02 IC1.3
  Bottom 0.305: v3.44,84.61 v3.44,91.6
N$17  (via drill 0.33 pad 0.7)
  Top 0.178: IC6.16 23.49,29.53 v25.19,29.53 | C34.+ 24.9,25.72 v26.14,25.72 26.56,25.72 C35.1
  Bottom 0.178: v25.19,29.53 25.19,26.67 v26.14,25.72
N$18  (via drill 0.33 pad 0.7)
  Top 0.178: C40.- 4.45,25.88 R51.2 3.18,28.04 v3.12,28.1 4.81,28.1 R54.1 | v3.12,25.4 3.12,24.71 C49.1
  Bottom 0.178: v3.12,28.1 v3.12,25.4
N$19
  Top 0.178: IC2.31 10.98,48.03 C16.1
N$20  (via drill 0.33 pad 0.7)
  Top 0.178: v4.39,32.38 2.17,32.38 1.85,32.7 1.85,33.12 R52.2
  Bottom 0.178: J6.1 5.03,16.83 5.35,17.14 5.35,21.75 6.46,22.86 6.46,24.29 4.24,26.51 4.24,31.91 4.39,32.07 v4.39,32.38
N$21
  Top 0.178: R54.2 6.67,28.68 5.98,29.37 2.64,29.37 J8.2
N$22  (via drill 0.33 pad 0.7)
  Top 0.178: R3.2 v20.74,83.11
  Bottom 0.178: v20.74,83.11 20.74,86.74 LED1.1
N$23  (via drill 0.33 pad 0.7)
  Top 0.178: v9.63,23.5 8.36,23.5 7.67,22.8 R38.2 v6.62,22.07 | v9.63,25.08 10.24,25.08 C33.- | v3.44,13.02 3.02,13.02 R43.2
  Bottom 0.178: v9.63,23.5 v9.63,25.08 | v6.62,22.07 6.62,14.61 5.66,13.65 4.08,13.65 v3.44,13.02
N$25  (via drill 0.33 pad 0.7)
  Top 0.178: v2.96,4.29 3.02,4.34 R42.2 4.08,5.24 5.19,6.35 IC8.2 | C43.1 2.65,7.99 v2.65,8.41 2.17,8.41 1.22,9.37 1.22,9.9 R44.1 R43.1
  Bottom 0.178: v2.96,4.29 2.96,8.1 v2.65,8.41
N$26  (via drill 0.33 pad 0.7)
  Top 0.178: R35.2 36.25,17.04 v36.3,16.99
  Bottom 0.178: v36.3,16.99 37.73,16.99 38.52,17.78 38.52,29.7 J5.2
N$27  (via drill 0.33 pad 0.7)
  Top 0.178: R4.2 18.67,69.59 17.99,70.27 v18.05,70.33
  Bottom 0.178: v18.05,70.33 17.73,70.64 17.73,72.3 LED2.3
N$28
  Top 0.178: R56.2 1.85,2.54 1.22,3.17 1.22,5.14 R42.1 1.32,6.35 | 1.32,6.35 C43.2 | IC8.1 5.35,7.62 4.08,6.35 1.32,6.35
N$29
  Top 0.178: J10.2 5.03,2.22 4.55,2.7 3.97,2.7 R56.1
N$30
  Top 0.178: C38.1 R32.2 37.95,18.82 | 37.95,18.82 R35.1 R37.1 | 37.95,18.82 35.12,18.82 34.08,17.78 IC7.6
N$31  (via drill 0.33 pad 0.7)
  Top 0.178: C32.- 19.19,24.95 v19,24.77 | v18.84,13.18 18.84,12.6 R33.2 | v18.84,10.32 18.84,9.58 R40.2
  Bottom 0.178: v19,24.77 19,23.81 19.32,23.5 19.32,13.65 v18.84,13.18 v18.84,10.32
N$32  (via drill 0.33 pad 0.7)
  Top 0.178: v17.09,5.56 17.04,5.61 R41.2 12.93,4.92 IC8.6 v9.79,5.08 | v17.09,8.1 17.09,7.68 C42.1 | v17.25,10.48 17.25,9.58 R40.1 | R39.1 8.74,9.63 v9.47,8.89
  Bottom 0.178: v17.09,5.56 v17.09,8.1 17.09,10.32 v17.25,10.48 | v9.47,8.89 9.47,5.4 v9.79,5.08
N$33  (via drill 0.33 pad 0.7)
  Top 0.178: R55.2 18.74,1.75 19.16,1.75 v19,1.59 | R41.1 18.84,5.02 v18.84,5.71 18.21,6.35 IC8.7 | v18.68,8.26 18.68,7.56 C42.2
  Bottom 0.178: v19,1.59 19,5.87 v18.84,5.71 18.84,8.1 v18.68,8.26
N$34
  Top 0.178: J9.2 15.34,1.57 16.3,2.54 R55.1
N$35  (via drill 0.33 pad 0.7)
  Top 0.178: R5.2 21.12,69.6 v21.38,69.86
  Bottom 0.178: v21.38,69.86 21.86,70.34 21.86,72.61 LED2.1
N$37  (via drill 0.33 pad 0.7)
  Top 0.178: IC2.52 21.49,49.03 v21.22,48.75 | v20.03,80.37 20.69,80.37 R3.1
  Bottom 0.178: v21.22,48.75 21.22,53.04 20.99,53.27 20.99,68.51 22.54,70.06 22.54,76.19 20.48,78.24 20.48,79.92 v20.03,80.37
N$38
  Top 0.178: R50.1 29.79,11.43 28.21,9.84 24.73,9.84 J2.1
N$39  (via drill 0.33 pad 0.7)
  Top 0.178: J8.1 10.11,30.48 v5.82,34.77 | v5.82,37.31 2.59,37.31 R53.2
  Bottom 0.178: v5.82,34.77 v5.82,37.31
N$40  (via drill 0.33 pad 0.7)
  Top 0.178: IC2.8 19.88,56.42 v19.41,55.94 | v18.13,67.56 18.47,67.56 R4.1
  Bottom 0.178: v19.41,55.94 19.22,55.94 18.72,56.44 18.72,65.8 19.04,66.12 19.04,67.08 18.69,67.43 18,67.43 v18.13,67.56
N$41
  Top 0.178: IC6.25 23.53,35.4 25.51,35.4 26.14,34.77 C24.2 27.41,34.19 Q3.2
N$42
  Top 0.178: IC6.26 25.7,36.01 26.62,35.08 31.7,35.08 32.17,34.61 32.17,33.5 Q3.1 33.18,34.19 C23.2
N$43  (via drill 0.33 pad 0.7)
  Top 0.178: IC2.53 20.6,49.53 v20.36,49.77 | v17.61,80.34 18.43,80.34 R1.1
  Bottom 0.178: v20.36,49.77 20.36,50.7 19.82,51.23 19.82,52.37 19.49,52.7 19.49,54.93 19.99,55.42 19.99,55.47 20.11,55.59 20.11,56.26 19.64,56.73 19.3,56.73 19.1,56.93 19.1,65.62 19.4,65.92 19.4,67.39 18.76,68.03 18.76,79.19 v17.61,80.34
N$44  (via drill 0.33 pad 0.7)
  Top 0.178: IC2.51 23.25,48.53 v22.8,48.07 | v21.76,67.31 21.32,67.31 R5.1
  Bottom 0.178: v22.8,48.07 22.8,48.53 21.7,49.63 21.7,53.32 21.38,53.63 21.38,66.93 v21.76,67.31
N$45
  Top 0.178: J10.1 6.89,9.83 R39.2
N$46
  Top 0.178: SJ1.1 9.16,12.06 8.04,10.95 3.97,10.95 R44.2
N$47
  Top 0.178: J9.1 14.55,10 13.76,10.79 11.94,10.79 SJ1.2
N$56
  Top 0.305: JP3.2 JP3.1 | JP3.1 | JP3.1 18.36,102.23 15.82,104.78 15.82,106.05 14.55,107.31 L1.2
N$64
  Top 0.305: JP3.10 JP3.9 | JP3.9 | JP3.9 18.21,91.92 16.14,93.98 16.14,99.44 L2.2
N$66  (via drill 0.33 pad 0.7)
  Top 0.178: R11.2 3.34,49.27 v3.29,49.22 | v3.29,52.07 Q2.B
  Bottom 0.178: v3.29,49.22 v3.29,52.07
Net_95
  Top 0.305: L1.1 12.34,107.31 D7.3
Net_96
  Top 0.305: L2.1 13.5,100.91 11.06,103.35 8.84,103.35 8.2,103.98 D7.4
NORMALIZATION_PROBE  (via drill 0.33 pad 0.7)
  Top 0.178: R53.1 3.18,39.21 v3.92,39.21 | v3.92,40.8 4.08,40.96 7.58,40.96 D3.3 8.37,41.75 10.11,41.75 13.28,44.93 14.71,44.93 16.14,43.5 18.05,43.5 18.88,44.34 IC2.39 | R57.1 3.28,36.09 3.28,35.88 v3.92,35.88 3.28,35.24 3.28,33.6 R52.1
  Bottom 0.178: v3.92,40.8 v3.92,39.21 v3.92,35.88
POSITION_ATT  (via drill 0.33 pad 0.7)
  Top 0.178: v34.24,78.74 33.45,79.53 32.73,79.53 IC4.15
  Bottom 0.178: R49.P$2 29.79,36.99 31.86,39.05 31.86,49.05 31.22,49.69 31.22,52.86 32.49,54.13 33.13,54.13 36.14,57.15 36.14,74.3 34.24,76.2 v34.24,78.74
POSITION_CV  (via drill 0.33 pad 0.7)
  Top 0.178: C38.2 36.25,23.12 v36.3,23.18 35.19,24.29 33.13,24.29 32.81,23.97 26.14,23.97 25.67,24.45 v23.76,24.45 | v36.3,20.8 36.3,20.22 R32.1 35.03,20.16 33.92,19.05 IC7.7 | IC2.23 14.6,52.03 14.87,51.75 15.98,51.75 v16.3,51.44
  Bottom 0.178: v36.3,23.18 v36.3,20.8 | v16.3,51.44 15.98,51.44 15.03,50.48 15.03,50.16 12.49,47.62 12.49,41.27 14.55,39.21 14.55,33.97 19,29.53 19,27.15 21.06,25.08 23.13,25.08 v23.76,24.45
POSITION_POT  (via drill 0.33 pad 0.7)
  Top 0.178: v8.04,46.51 v5.98,48.58 | v6.3,72.23 10.11,72.23 13.28,75.41 15.23,75.41 16.72,73.91 22.56,73.91 24.71,71.75 v31.86,71.75 | v33.45,77.47 32.68,77.47 IC4.12
  Bottom 0.178: R30.P$2 9.33,36.18 8.2,37.31 8.2,46.35 v8.04,46.51 | v5.98,48.58 5.98,55.72 6.46,56.2 6.46,59.85 5.19,61.12 5.19,71.12 v6.3,72.23 | v31.86,71.75 31.86,75.88 v33.45,77.47
RESET  (via drill 0.33 pad 0.7)
  Top 0.178: JP1.10 34.72,55.4 31.28,55.4 R6.1 31.24,55.4 v31.38,55.4 | IC2.7 20.38,56.4 20.9,55.88 v22.33,55.88 | v23.6,58.9 25.03,60.33 v31.06,60.33
  Bottom 0.178: v22.33,55.88 22.33,56.04 23.6,57.31 v23.6,58.9 | v31.06,60.33 31.06,55.72 v31.38,55.4
STRUM
  Top 0.178: IC2.16 15.88,56.89 15.67,56.67 9,56.67 | 9,56.67 9,57.57 R8.1 | 9,56.67 5.68,56.67 Q2.C
SW_MODE  (via drill 0.33 pad 0.7)
  Top 0.178: SW2.3 16.38,68.5 16.3,68.58 16.3,67.31 17.09,66.52 v18.36,66.52 21.86,66.52 22.81,67.47 22.81,68.22 SW2.4 | v19.09,52.17 19.35,52.17 19.61,51.91 22.81,51.91 24.42,53.53 IC2.61
  Bottom 0.178: v18.36,66.52 18.36,55.72 19.09,54.99 v19.09,52.17
SW_POLYPHONY  (via drill 0.33 pad 0.7)
  Top 0.178: SW1.3 v19.58,79.02 | v19.58,79.02 | v19.58,79.02 SW1.4 | v20.59,52.55 22.81,52.55 24.29,54.03 IC2.62
  Bottom 0.178: v19.58,79.02 19.58,74.51 20.59,73.5 v20.59,52.55
V_OCT_CV  (via drill 0.33 pad 0.7)
  Top 0.178: R13.1 2.86,19.84 4.24,19.84 v4.24,20 IC9.1 9.31,20 | v4.08,21.91 C14.2 | IC2.15 16.38,58.02 15.67,58.74 v15.67,59.37 | v11.38,20 9.31,20 | 9.31,20
  Bottom 0.178: v4.24,20 4.24,22.07 v4.08,21.91 | v15.67,59.37 15.67,57.47 14.55,56.36 13.6,56.36 10.59,53.34 10.59,50.64 9.79,49.85 9.79,38.26 10.59,37.47 10.59,35.08 7.57,32.07 7.57,29.21 11.38,25.4 v11.38,20
VCC  (via drill 0.33 pad 0.7)
  Top 0.305: IC8.8 11.54,7.62 v11.38,7.46 | v12.97,8.89 12.97,9.26 C39.1 | v2.49,76.04 6.31,76.04 C3.1 | v2.65,80.96 4.08,80.96 R2.2 | D7.1 2.81,100.01 v2.65,100.17
  Bottom 0.305: v11.38,7.46 11.54,7.46 | 11.54,7.46 v12.97,8.89 | 11.54,7.46 12.17,8.1 12.17,8.26 10.43,10 10.43,25.56 7.09,28.89 7.09,32.38 5.03,34.45 5.03,40.64 6.3,41.91 6.3,44.61 5.03,45.88 5.03,54.29 2.49,56.83 v2.49,76.04 2.49,80.8 v2.65,80.96 v2.65,100.17
VEE  (via drill 0.33 pad 0.7)
  Top 0.305: C1.- v1.06,70.8 | v2.49,48.42 2.65,48.42 2.65,47.84 R12.1 | v6.14,3.81 IC8.4 | C45.2 7.41,1.75 v6.78,2.38 | v0.9,101.76 10.43,101.76 10.9,101.28 10.9,100.17 D7.2
  Bottom 0.305: v6.78,2.38 6.78,3.17 v6.14,3.81 7.89,5.56 7.89,23.81 4.71,26.99 4.71,31.59 5.19,32.07 5.19,33.02 2.49,35.72 v2.49,48.42 2.49,49.85 1.06,51.28 v1.06,70.8 0.9,70.8 v0.9,101.76

## Text on the board
Top: JM
tPlace: C8 | L1 | JP3 | L2 | D7 | C47 | IC1 | EITHER WAY | C2 | C6 | C12 | R1 | R3 | C13 | R2 | C3 | IC4 | R4 | R5 | C48 | C1 | C4 | Q1 | C41 | C46 | C7 | C44 | C5 | C9 | CC-BY-SA-3.0 | L3 | C10 | R8 | IC2 | R6 | Q2 | ORIGINAL RINGS BY OLIVIER GILLET | C11 | R7 | R11 | JP1 | C16 | R12 | C20 | C17 | C18 | C22 | D3 | R16 | C27 | R17 | C25 | R53 | C21 | IC6 | R57 | C24 | C23 | R52 | nanoRings | C31 | C30 | Q3 | R54 | R51 | C40 | C33 | C32 | C34 | R27 | C35 | C49 | R38 | C19 | C28 | C26 | C37 | C38 | C14 | R25 | R18 | IC7 | R32 | R13 | IC9 | R14 | R21 | R19 | R35 | R15 | R23 | R20 | R37 | R43 | SJ1 | R33 | C15 | R50 | R44 | R36 | R39 | C39 | R40 | R24 | IC3 | C50 | C43 | C42 | C29 | C36 | IC5 | R42 | R26 | R31 | R41 | R34 | R56 | R55 | R22 | IC8 | C45
bPlace: R9 | R46 | R10 | R48 | LED1 | SW1 | R28 | R45 | LED2 | SW2 | R29 | R47 | R30 | R49 | J8 | J5 | in | pos | strum | voct | damp | bright | J6 | J7 | J3 | J1 | even | odd | fm | J10 | J9 | J2 | J4 | PJ301_THONKICONN6
tDocu: C8 | L1 | JP3 | L2 | D7 | C47 | IC1 | C2 | C6 | C12 | R1 | R3 | C13 | R2 | C3 | IC4 | R4 | R5 | C48 | C1 | C4 | Q1 | C41 | C46 | C7 | C44 | C5 | C9 | L3 | C10 | R8 | IC2 | R6 | Q2 | C11 | R7 | R11 | JP1 | C16 | R12 | C20 | C17 | C18 | C22 | D3 | R16 | C27 | R17 | C25 | R53 | C21 | IC6 | R57 | C24 | C23 | Fixed swapped LEDs | R52 | C31 | C30 | Q3 | R54 | R51 | C40 | C33 | C32 | C34 | R27 | C35 | C49 | R38 | C19 | C28 | C26 | C37 | C38 | C14 | R25 | R18 | IC7 | R32 | R13 | IC9 | R14 | R21 | R19 | R35 | R15 | R23 | R20 | R37 | R43 | SJ1 | R33 | C15 | R50 | R44 | R36 | R39 | C39 | R40 | R24 | IC3 | C50 | C43 | C42 | C29 | C36 | IC5 | R42 | R26 | R31 | R41 | R34 | R56 | R55 | R22 | IC8 | C45
bDocu: R9 | R46 | R10 | R48 | LED1 | SW1 | R28 | R45 | LED2 | SW2 | R29 | R47 | R30 | R49 | J8 | J5 | in | pos | strum | voct | damp | bright | J6 | J7 | J3 | J1 | even | odd | fm | J10 | J9 | J2 | J4 | PJ301_THONKICONN6